# Altium PCB DUT_ESP32-D0WD-V3.PcbDoc
Units mm, origin at the board's own origin, x right, y up, seen from the top; angles counter-clockwise.
Board outline 33 x 90 mm, 2 copper layers (Top Layer, Bottom Layer); 27 components, 50 nets, 259 pads, 9 vias.
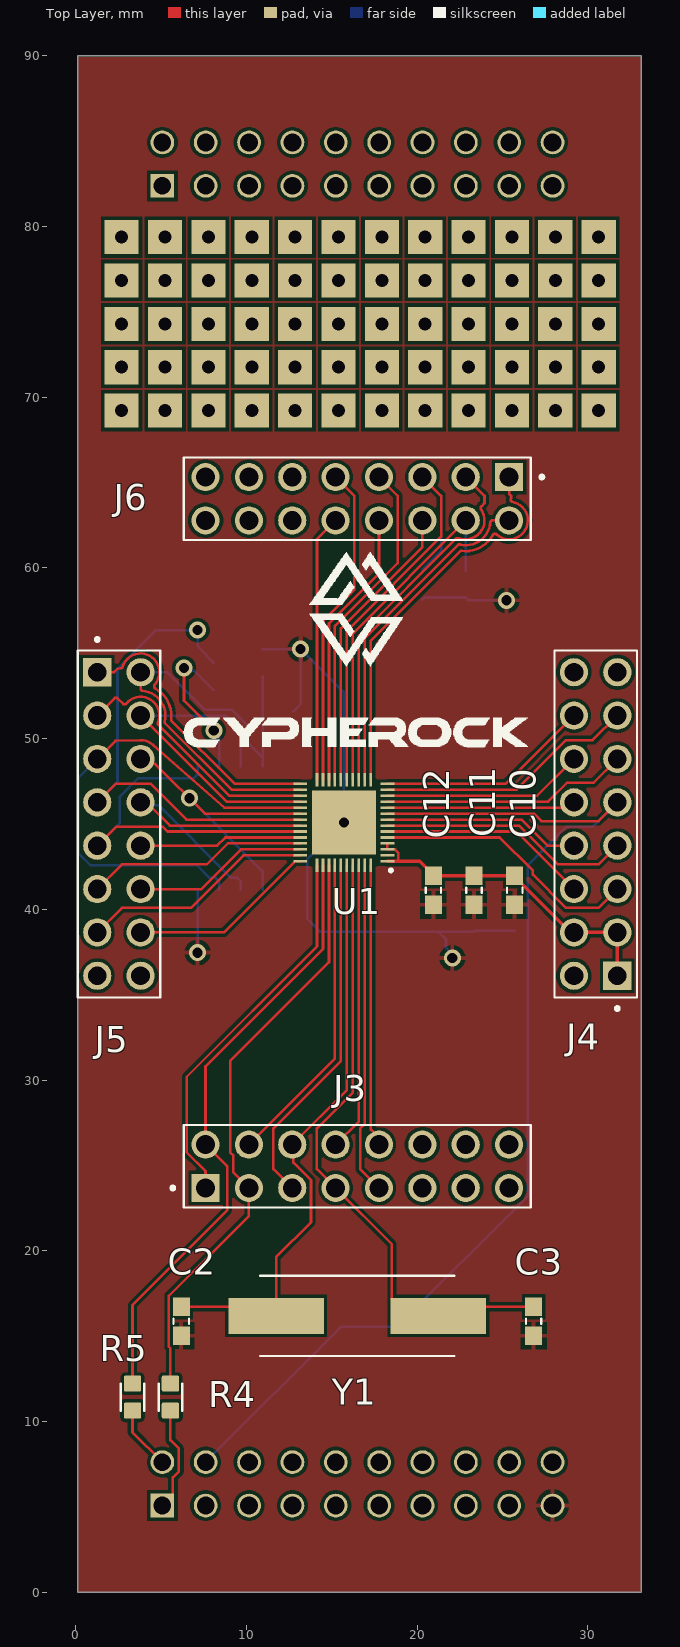
[diagram p0: Top Layer view]
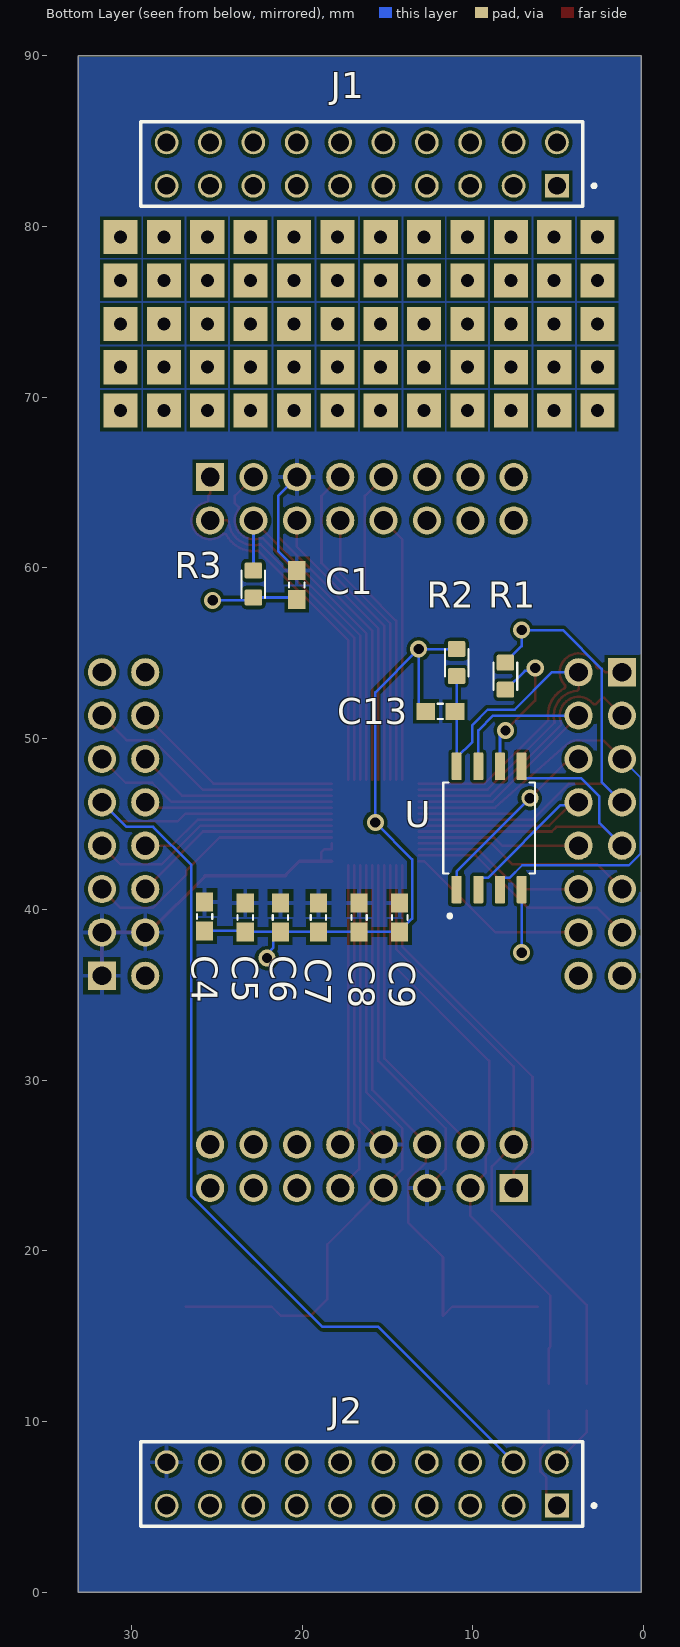
[diagram p1: Bottom Layer view, seen from below]
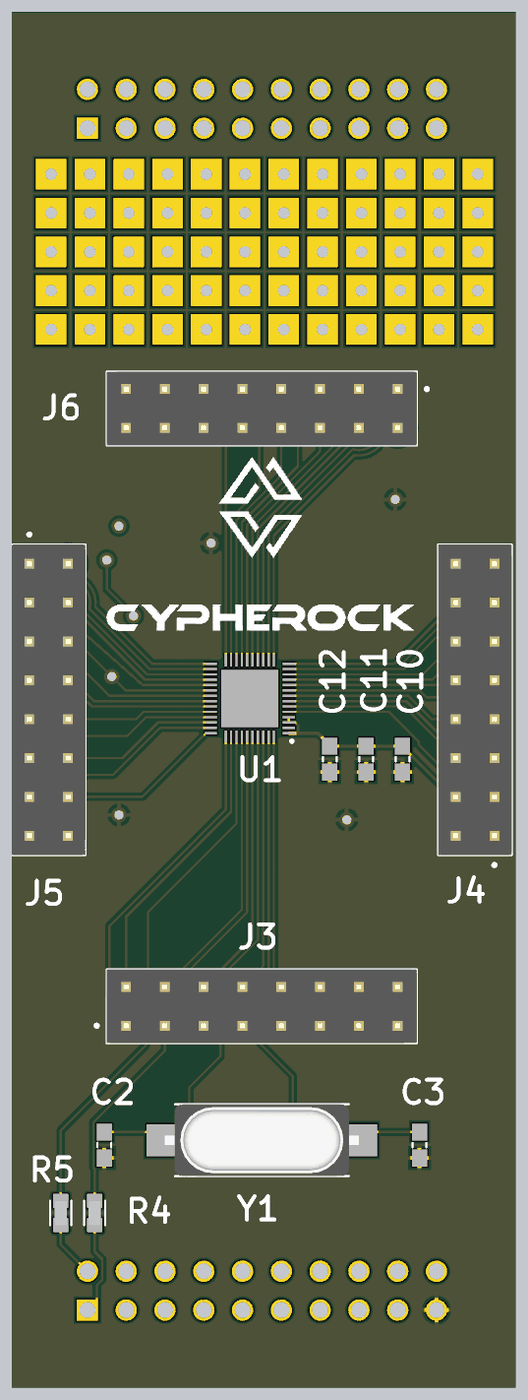
[diagram p2: 3D render of the assembled board from above, using the file's embedded part models]

## Layer stack, top to bottom
Top Solder: solder mask 0.0102, Solder Resist, Dk 3.5
Top Layer: signal copper 0.0356
Dielectric 1: dielectric 0.32, FR-4, Dk 4.8
Bottom Layer: signal copper 0.0356
Bottom Solder: solder mask 0.0102, Solder Resist, Dk 3.5

## Board outline
0.127,0 0.127,90 33.127,90 33.127,0

## Design rules (kind name [scope] priority, off if disabled: settings)
Clearance [All] p1: gap=0.2 ignorepadtopadclearanceinfootprint=FALSE except(0.15: Arc-SMDPad Track-SMDPad)
PolygonConnect [All] p1: connectstyle=Relief reliefconductorwidth=0.254 reliefentries=4 polygonreliefangle="90 Angle" airgapwidth=0.254
RoutingVias [All] p1: holewidth=0.711 width=1.27 viastyle="Through Hole" minholewidth=0.711 minwidth=1.27 maxholewidth=0.711 maxwidth=1.27
SolderMaskExpansion [All] p1: expansion=0.102 istentingtop=FALSE
Width [All] p1: maxlimit=0.254 minlimit=0.15 preferedwidth=0.254 minimp=50.000000 maximp=50.000000 favimp=50.000000
30 further rules are at their usual default settings.

## Components (designator, comment, footprint, x,y, rotation, side; value= is the part's Value field where it differs from the comment)
C1 "0.1uF" CAPC1608X90 20.32,58.999 r270 bottom
C2 "27pF" CAPC1608X90 6.191,15.875 r90 top
C3 "27pF" CAPC1608X90 26.829,15.875 r90 top
C4 "100pF" CAPC1608X90 25.717,39.585 r270 bottom
C5 "1uF" CAPC1608X90 23.336,39.529 r270 bottom
C6 "0.1uF" CAPC1608X90 21.273,39.529 r270 bottom
C7 "10uF" CAPC1608X90 19.05,39.529 r270 bottom
C8 "1uF" CAPC1608X90 16.669,39.529 r270 bottom
C9 "0.1uF" CAPC1608X90 14.287,39.529 r270 bottom
C10 "10uF" CAPC1608X90 25.717,41.116 r270 top
C11 "1uF" CAPC1608X90 23.336,41.116 r270 top
C12 "1uF" CAPC1608X90 20.955,41.116 r270 top
C13 "10uF" CAPC1608X90 11.906,51.594 r0 bottom
J1 "SSW-110-01-G-D-LL" SAMTEC_SSW-110-01-G-D-LL 5.08,82.38 r180 bottom
J2 "SSW-110-01-G-D-LL" SAMTEC_SSW-110-01-G-D-LL 5.08,5.08 r180 bottom locked
J3 "77313-124-16LF" AMPHENOL_77313-124-16LF 16.5,24.95 r0 top locked
J4 "77313-124-16LF" AMPHENOL_77313-124-16LF 30.46,45 r90 top
J5 "77313-124-16LF" AMPHENOL_77313-124-16LF 2.54,45 r270 top locked
J6 "77313-124-16LF" AMPHENOL_77313-124-16LF 16.5,64.05 r180 top
R1 "200E/0.1W" RESC1608X50N 8.096,53.657 r90 bottom
R2 "2k/0.1W" RESC1608X50N 10.954,54.451 r270 bottom
R3 "10k/0.1W" RESC1608X50N 22.86,59.055 r90 bottom
R4 "0E/0.1W" RESC1608X50N 5.556,11.43 r90 top
R5 "0E/0.1W" RESC1608X50N 3.334,11.43 r270 top
U "W25Q64BVSSIG" SOIC127P790X216-8N 9.049,44.767 r90 bottom
U1 "ESP32-D0WD-V3" QFN35P500X500X90-49N-D 15.716,45.085 r180 top
Y1 "ABLS-8.000MHZ-B2-T" XTAL_ABLS-8.000MHZ-B2-T 16.5,16.192 r0 top

## Footprints (in the part's own frame and the unit in brackets; to place one, negate y for a bottom-side part, rotate by r counter-clockwise, add the part's x,y. Pads: shape width x height; smd on the part's side, far side on the other; paste and mask are expansions set on the pad)
AMPHENOL_77313-124-16LF [mm]
  rect 1.65x1.65 / inner round 1.65 / far side rect 1.65x1.65 hole 1.1: 01(-8.89,-1.27)
  round 1.65 hole 1.1: 02(-8.89,1.27) 03(-6.35,-1.27) 04(-6.35,1.27) 05(-3.81,-1.27) 06(-3.81,1.27) 07(-1.27,-1.27) 08(-1.27,1.27) 09(1.27,-1.27) 10(1.27,1.27) 11(3.81,-1.27) 12(3.81,1.27) 13(6.35,-1.27) 14(6.35,1.27) 15(8.89,-1.27) 16(8.89,1.27)
  silkscreen extent -10.91,-2.41 10.16,2.41, body extent -10.16,-2.41 10.16,2.41, height 9.3
CAPC1608X90 [mm]
  rect 1.1x1 smd: 1(-0.85,0) 2(0.85,0)
  silkscreen extent -0.15,-0.45 0.15,0.45
QFN35P500X500X90-49N-D [mm]
  rect 0.8x0.15 smd: 1(-2.55,2.275) 2(-2.55,1.925) 3(-2.55,1.575) 4(-2.55,1.225) 5(-2.55,0.875) 6(-2.55,0.525) 7(-2.55,0.175) 8(-2.55,-0.175) 9(-2.55,-0.525) 10(-2.55,-0.875) 11(-2.55,-1.225) 12(-2.55,-1.575) 13(-2.55,-1.925) 14(-2.55,-2.275) 25(2.55,-2.275) 26(2.55,-1.925) 27(2.55,-1.575) 28(2.55,-1.225) 29(2.55,-0.875) 30(2.55,-0.525) 31(2.55,-0.175) 32(2.55,0.175) 33(2.55,0.525) 34(2.55,0.875) 35(2.55,1.225) 36(2.55,1.575) 37(2.55,1.925) 38(2.55,2.275)
  rect 0.15x0.8 smd: 15(-1.575,-2.5) 16(-1.225,-2.5) 17(-0.875,-2.5) 18(-0.525,-2.5) 19(-0.175,-2.5) 20(0.175,-2.5) 21(0.525,-2.5) 22(0.875,-2.5) 23(1.225,-2.5) 24(1.575,-2.5) 39(1.575,2.5) 40(1.225,2.5) 41(0.875,2.5) 42(0.525,2.5) 43(0.175,2.5) 44(-0.175,2.5) 45(-0.525,2.5) 46(-0.875,2.5) 47(-1.225,2.5) 48(-1.575,2.5)
  rect 3.75x3.75 smd: 49(0,0)
  silkscreen extent -2.84,2.71 -2.66,2.89
RESC1608X50N [mm]
  rrect20% 0.94x1.02 smd: 1(-0.79,0) 2(0.79,0)
  silkscreen extent -0.8,-0.69 0.8,0.69, body extent -0.8,-0.4 0.8,0.4, height 0.23
SAMTEC_SSW-110-01-G-D-LL [mm]
  rect 1.39x1.39 hole 1.04: 01(0,0)
  round 1.39 hole 1.04: 02(0,2.54) 03(-2.54,0) 04(-2.54,2.54) 05(-5.08,0) 06(-5.08,2.54) 07(-7.62,0) 08(-7.62,2.54) 09(-10.16,0) 10(-10.16,2.54) 11(-12.7,0) 12(-12.7,2.54) 13(-15.24,0) 14(-15.24,2.54) 15(-17.78,0) 16(-17.78,2.54) 17(-20.32,0) 18(-20.32,2.54) 19(-22.86,0) 20(-22.86,2.54)
  silkscreen extent -24.39,-1.21 2.27,3.75
SOIC127P790X216-8N [mm]
  rrect15% 1.61x0.58 smd: 1(-3.605,1.905) 2(-3.605,0.635) 3(-3.605,-0.635) 4(-3.605,-1.905) 5(3.605,-1.905) 6(3.605,-0.635) 7(3.605,0.635) 8(3.605,1.905)
  silkscreen extent -5.25,-2.69 2.67,2.69
XTAL_ABLS-8.000MHZ-B2-T [mm]
  rect 5.6x2.1 smd: 1(-4.75,0) 2(4.75,0)
  silkscreen extent -5.7,-2.35 5.7,2.35, body extent -6.35,-2.35 6.35,2.35, height 4.06

## Part data
C1 C4 C5 C6 C7 C8 C9 C10 C11 C12 C13: library part CC0603MRX5R7BB106, "CAP CER 10UF 16V X5R 0603", Package=None, Availability=Unavailable, MP=CC0603MRX5R7BB106, Price=None
C2 C3: library part CC0603MRX5R7BB106, "0603", Package=None, Availability=Unavailable, MP=CC0603MRX5R7BB106, Price=None
J1 J2: Package=None, Availability=Unavailable, MF="Samtec Inc.", MP=SSW-110-01-G-D-LL, Price=None
J3 J4 J5 J6: "BergStikÂ®, Board to Board connector, Unshrouded Header, 2.54 mm Pitch, Vertical, Double Row,Through Hole, 16 Positions", Package=None, Check_prices=https://www.snapeda.com/parts/77313-124-16LF/Amphenol+FCI/view-part/?ref=eda, MF="Amphenol ICC (FCI)", MP=77313-124-16LF, SnapEDA_Link=https://www.snapeda.com/parts/77313-124-16LF/Amphenol+FCI/view-part/?ref=snap
R1 R2 R3 R4 R5: library part 3-1879460-5, "RES 0.27 OHM 1% 1/10W 0603", Package=0603, Power_Rating=".1 W", Resistance=27, Tolerance=1%, Availability="In Stock", Check_prices=https://www.snapeda.com/parts/3-1879460-5/TE+Connectivity/view-part/?ref=eda, EU_RoHS_Compliance="Compliant with Exemptions", MF="TE Connectivity", MP=3-1879460-5, Price=None, SnapEDA_Link=https://www.snapeda.com/parts/3-1879460-5/TE+Connectivity/view-part/?ref=snap
U: "FLASH - NOR Memory IC 64Mb _8M x 8_ SPI 80MHz 8-SOIC", Package="SOIC-8 Winbond", Availability=Unavailable, MF="Winbond Electronics", MP=W25Q64BVSSIG, Price=None, SnapEDA_Link=https://www.snapeda.com/parts/W25Q64BVSSIG/Winbond%20Electronics/view-part/261027/?ref=snap
U1: "WiFi Development Tools (802.11) SMD IC WiFi Dual Core BT Combo", Manufacturer_Name="Espressif Systems", Mouser Part Number=356-ESP32-D0WD-V3, Datasheet Link=https://www.espressif.com/sites/default/files/documentation/esp32_datasheet_en.pdf, Geometry.Height=0.9mm, Manufacturer_Part_Number=ESP32-D0WD-V3, Mouser Price/Stock=https://www.mouser.co.uk/ProductDetail/Espressif-Systems/ESP32-D0WD-V3?qs=GBLSl2AkirsI7kXw8ZPing%3D%3D
Y1: "HC/49US (AT49) SMD LOW PROFILE CRYSTAL", Package="HC49/US Abracon", Availability="In Stock", Check_prices=https://www.snapeda.com/parts/ABLS-8.000MHZ-B2-T/Abracon+LLC/view-part/?ref=eda, MF="Abracon LLC", MP=ABLS-8.000MHZ-B2-T, Price=None, Purchase-URL=https://pricing.snapeda.com/search/part/ABLS-8.000MHZ-B2-T/?ref=eda, SnapEDA_Link=https://www.snapeda.com/parts/ABLS-8.000MHZ-B2-T/Abracon+LLC/view-part/?ref=snap

## Free pads (board coordinates)
  rect 2x2 hole 0.762: 17(2.699,69.215) 17(2.699,71.755) 17(2.699,74.295) 17(2.699,76.835) 17(2.699,79.375) 17(5.239,69.215) 17(5.239,71.755) 17(5.239,74.295) 17(5.239,76.835) 17(5.239,79.375) 17(7.779,69.215) 17(7.779,71.755) 17(7.779,74.295) 17(7.779,76.835) 17(7.779,79.375) 17(10.319,69.215) 17(10.319,71.755) 17(10.319,74.295) 17(10.319,76.835) 17(10.319,79.375) 17(12.859,69.215) 17(12.859,71.755) 17(12.859,74.295) 17(12.859,76.835) 17(12.859,79.375) 17(15.399,69.215) 17(15.399,71.755) 17(15.399,74.295) 17(15.399,76.835) 17(15.399,79.375) 17(17.939,69.215) 17(17.939,71.755) 17(17.939,74.295) 17(17.939,76.835) 17(17.939,79.375) 17(20.479,69.215) 17(20.479,71.755) 17(20.479,74.295) 17(20.479,76.835) 17(20.479,79.375) 17(23.019,69.215) 17(23.019,71.755) 17(23.019,74.295) 17(23.019,76.835) 17(23.019,79.375) 17(25.559,69.215) 17(25.559,71.755) 17(25.559,74.295) 17(25.559,76.835) 17(25.559,79.375) 17(28.099,69.215) 17(28.099,71.755) 17(28.099,74.295) 17(28.099,76.835) 17(28.099,79.375) 17(30.639,69.215) 17(30.639,71.755) 17(30.639,74.295) 17(30.639,76.835) 17(30.639,79.375)

## Via types
v1: diameter 1, hole 0.6, Top Layer to Bottom Layer, tented top, 9 vias

## Nets (pads, with @x,y where several pads share a name; then routed paths per layer and width w, separated by ;. In a path a pad name is that pad's centre, name@x,y a point inside that pad or via, vN(x,y) a via of type N, cw(c..) or ccw(c..) an arc to the next point about the centre after c; other vN are vias at no path point)
3V3: C1.1 C4.1 C5.1 C6.1 C7.1 C8.1 C9.1 C10.1 C11.1 C12.1 J2.20 J3.05 J3.08 J4.01 J4.03 J4.04 J6.05 U1.1 U1.3 U1.4 U1.19 U1.43 U1.46 | length 84.1
  Top Layer w0.15: J3.05 11.59,24.78 11.59,27.165 15.541,31.116 U1.43 ; J3.08 16.591,27.581 U1.46 ; U1.19 15.891,56.316 21.41,61.835 21.41,64.22 J6.05 ; U1.4 U1.3 18.709,43.51 18.891,43.328 18.891,42.81
  Top Layer w0.2: U1.1 18.891,42.81 20.161,42.81 20.955,42.016 C12.1 C11.1 C10.1 25.717,41.916 28.984,38.65 J4.04 J4.03 J4.01
  Bottom Layer w0.15: J6.05 21.41,64.22 21.41,60.989 20.32,59.899 C1.1
GND: J2.17
GNDA: C1.2 C2.1 C3.1 C4.2 C5.2 C6.2 C7.2 C8.2 C9.2 C10.2 C11.2 C12.2 C13.2 J2.19 R2.1 R3.1 U1.49 U.4 | length 46.9
  Bottom Layer w0.15: v1(7.144,37.465) U.4 ; R2.1 10.957,55.245 v1(13.176,55.245) ; C13.2 13.176,52.014 v1(13.176,55.245) ; C1.2 20.436,58.265 R3.1 23.022,58.102 v1(25.241,58.102) ; v1(22.066,37.148) 22.066,37.378 21.698,37.746 21.698,38.254 C6.2 ; C4.2 23.393,38.735 C5.2 C6.2 ; v1(13.176,55.245) 15.716,52.705 v1(15.716,45.085) 13.562,42.931 13.562,39.454 14.287,38.729 C9.2 C8.2 C7.2 C6.2
NetC2_2: C2.2 J3.06 U1.44 Y1.1 | length 34.8
  Top Layer w0.15: C2.2 11.217,16.725 Y1.1 11.75,19.632 13.79,21.672 13.79,24.136 12.756,25.17 12.756,26.154 J3.06 15.891,29.421 U1.44
NetC3_2: C3.2 J3.07 U1.45 Y1.2 | length 37
  Top Layer w0.15: U1.45 16.241,29.276 14.13,27.165 14.13,24.78 J3.07 18.525,20.385 18.525,17.167 19.5,16.192 Y1.2 21.783,16.725 C3.2
NetC13_1: C13.1 J5.02 R2.2 U1.26 U.8 | length 28.4
  Top Layer w0.15: J5.02 3.81,52.881 3.854,52.837 3.893,52.798 cw(c3.81,51.35) 5.22,51.01 5.22,50.993 5.22,50.93 9.14,47.01 U1.26
  Bottom Layer w0.15: J5.02 5.354,53.89 7.548,51.696 9.131,51.696 10.034,50.794 10.034,49.808 U.8@10.954,48.887 ; U.8 U.8@10.954,48.887 ; R2.2 10.954,51.594 U.8@10.954,48.887
NetJ2_01: J2.01 R4.1 | length 6.2
  Top Layer w0.15: J2.01 5.7,5.7 5.7,6.723 6.05,7.073 6.05,8.413 5.556,8.906 R4.1
NetJ2_02: J2.02 R5.2 | length 3.7
  Top Layer w0.15: R5.2 3.334,9.366 J2.02
NetJ2_03: J2.03
NetJ2_04: J2.04 J4.09 U1.9 | length 65.6
  Top Layer w0.15: U1.9 26.841,45.61 27.281,45.17 30.63,45.17 J4.09
  Bottom Layer w0.15: J2.04 15.541,15.541 18.806,15.541 26.49,23.224 26.49,42.586 28.734,44.83 30.29,44.83 J4.09
NetJ2_07: J2.07
NetJ2_08: J2.08
NetJ3_01: J3.01 U1.39 | length 22.5
  Top Layer w0.15: J3.01 7.61,24.664 6.51,25.764 6.51,30.197 14.141,37.828 U1.39
NetJ3_02: J3.02 R5.1 U1.40 | length 36
  Top Layer w0.15: R5.1 3.334,16.828 8.89,22.384 8.89,24.94 J3.02 7.61,30.802 14.491,37.683 U1.40
NetJ3_03: J3.03 R4.2 U1.41 | length 35.2
  Top Layer w0.15: R4.2 5.556,14.292 5.466,14.382 5.466,17.368 10.15,22.052 J3.03 9.24,24.59 9.24,25.574 9.05,25.764 9.05,31.117 14.841,36.908 U1.41
NetJ3_04: J3.04 U1.42 | length 18.5
  Top Layer w0.15: J3.04 15.191,31.261 U1.42
NetJ3_09: J3.09 U1.47 | length 19.5
  Top Layer w0.15: U1.47 16.941,27.436 16.67,27.165 16.67,24.78 J3.09
NetJ3_10: J3.10 U1.48 | length 16.6
  Top Layer w0.15: U1.48 17.291,27.105 17.77,26.626 J3.10
NetJ4_05: J4.05 U1.5 | length 15.8
  Top Layer w0.15: U1.5 24.842,44.21 26.788,42.264 26.788,42.036 28.734,40.09 30.63,40.09 J4.05
NetJ4_06: J4.06 U1.6 | length 12.3
  Top Layer w0.15: U1.6 25.82,44.56 J4.06
NetJ4_07: J4.07 U1.7 | length 14.9
  Top Layer w0.15: U1.7 25.965,44.91 28.245,42.63 30.63,42.63 J4.07
NetJ4_08: J4.08 U1.8 | length 11.6
  Top Layer w0.15: U1.8 26.11,45.26 27.64,43.73 J4.08
NetJ4_10: J4.10 U1.10 | length 11.1
  Top Layer w0.15: U1.10 28.474,45.96 28.784,46.27 J4.10
NetJ4_11: J4.11 U1.11 | length 14.5
  Top Layer w0.15: U1.11 27.674,46.31 28.781,47.416 30.336,47.416 J4.11
NetJ4_12: J4.12 U1.12 | length 11.8
  Top Layer w0.15: U1.12 27.04,46.66 J4.12
NetJ4_13: J4.13 U1.13 | length 15.3
  Top Layer w0.15: U1.13 25.834,47.01 28.734,49.91 30.29,49.91 J4.13
NetJ4_14: J4.14 U1.14 | length 12.6
  Top Layer w0.15: U1.14 25.2,47.36 J4.14
NetJ5_01: J5.01 U1.25 | length 17.1
  Top Layer w0.15: J5.01 2.254,53.89 2.457,54.093 2.64,54.119 ccw(c2.618,54.267) 2.761,54.221 cw(c3.81,53.89) 4.633,53.16 ccw(c4.746,53.061) 4.673,52.93 cw(c3.81,51.35) 5.598,51.146 5.598,51.138 5.598,51.075 9.314,47.36 U1.25
NetJ5_03: J5.03 U1.27 | length 15.6
  Top Layer w0.15: J5.03 2.308,52.388 2.432,52.388 2.802,52.018 2.864,52.018 2.927,52.018 2.971,52.062 2.975,52.066 cw(c3.81,51.35) 4.824,50.923 4.824,50.893 4.824,50.831 8.995,46.66 U1.27
NetJ5_04: J5.04 U1.28 U.7 | length 19.8
  Top Layer w0.15: J5.04 8.85,46.31 8.912,46.31 U1.28
  Bottom Layer w0.15: J5.04 7.399,51.35 7.403,51.346 8.82,51.346 9.684,50.482 U.7
NetJ5_05: J5.05 U1.29 U.3 | length 29.2
  Top Layer w0.15: J5.05 2.326,49.866 3.777,49.91 cw(c3.81,48.81) 4.538,49.635 8.705,45.96 U1.29
  Bottom Layer w0.15: J5.05 0.17,47.71 0.17,43.274 0.861,42.583 7.111,42.583 7.845,41.849 8.199,41.849 8.414,41.634 U.3
NetJ5_06: J5.06 U1.30 U.1 | length 17.8
  Top Layer w0.15: J5.06 4.097,48.523 4.658,48.523 7.571,45.61 U1.30
  Bottom Layer w0.15: J5.06 J5.06@3.821,48.81 ; v1(6.667,46.514) 10.954,42.227 U.1
NetJ5_07: J5.07 R1.2 U1.31 | length 29.5
  Top Layer w0.15: J5.07 2.37,47.37 4.383,47.37 6.493,45.26 U1.31
  Bottom Layer w0.15: J5.07 2.456,47.456 2.456,54.091 4.721,56.356 v1(7.144,56.356) 7.144,55.419 7.673,54.889 7.673,54.841 8.067,54.448 R1.2@8.092,54.448
NetJ5_08: J5.08 U1.32 U.2 | length 18.2
  Top Layer w0.15: J5.08 4.168,46.27 5.528,44.91 U1.32
  Bottom Layer w0.15: J5.08 3.976,46.104 4.86,46.104 9.115,41.849 9.469,41.849 9.684,41.634 U.2
NetJ5_09: J5.09 U1.33 U.5 | length 21.4
  Top Layer w0.15: J5.09 2.37,44.83 5.113,44.83 5.383,44.56 U1.33
  Bottom Layer w0.15: J5.09 2.592,45.052 2.592,46.608 3.67,47.686 6.929,47.686 7.144,47.901 U.5
NetJ5_10: J5.10 U1.34 | length 9.6
  Top Layer w0.15: J5.10 8.289,43.73 8.769,44.21 U1.34
NetJ5_11: J5.11 U1.35 | length 13
  Top Layer w0.15: J5.11 2.71,42.63 7.684,42.63 8.914,43.86 U1.35
NetJ5_12: J5.12 U1.36 | length 10.3
  Top Layer w0.15: J5.12 7.369,41.19 9.689,43.51 U1.36
NetJ5_13: J5.13 U1.37 | length 13.8
  Top Layer w0.15: J5.13 2.71,40.09 6.764,40.09 9.834,43.16 U1.37
NetJ5_14: J5.14 U1.38 | length 11.1
  Top Layer w0.15: J5.14 8.681,38.65 12.841,42.81 U1.38
NetJ6_01: J6.01 U1.15 | length 23.7
  Top Layer w0.15: U1.15 17.291,55.736 22.55,60.995 22.612,60.995 22.621,60.995 ccw(c22.85,62.78) 24.43,61.918 cw(c24.561,61.844) 24.66,61.957 ccw(c25.39,62.78) 25.567,63.866 25.534,63.899 25.491,63.943 25.491,64.067 25.513,64.089 25.513,64.213 25.39,64.336 J6.01
NetJ6_02: J6.02 U1.16 | length 19.8
  Top Layer w0.15: U1.16 16.941,55.881 22.43,61.37 22.493,61.37 22.51,61.37 ccw(c22.85,62.78) 24.298,62.697 24.337,62.736 24.381,62.78 J6.02
NetJ6_03: J6.03 U1.17 | length 21.9
  Top Layer w0.15: U1.17 16.591,56.026 22.287,61.722 22.315,61.75 22.439,61.75 22.554,61.72 ccw(c22.85,62.78) 23.754,63.406 23.726,63.448 23.726,63.572 23.763,63.61 23.95,63.796 23.95,64.22 J6.03
NetJ6_04: J6.04 R3.2 U1.18 | length 20.9
  Top Layer w0.15: U1.18 16.241,56.171 J6.04
  Bottom Layer w0.15: J6.04 22.85,59.855 R3.2
NetJ6_06: J6.06 U1.20 | length 17.2
  Top Layer w0.15: U1.20 15.541,56.461 20.31,61.23 J6.06
NetJ6_07: J6.07 U1.21 | length 19.7
  Top Layer w0.15: U1.21 15.191,56.606 18.87,60.285 18.87,64.22 J6.07
NetJ6_08: J6.08 U1.22 | length 16.4
  Top Layer w0.15: U1.22 14.841,56.751 17.77,59.68 J6.08
NetJ6_09: J6.09 U1.23 | length 19
  Top Layer w0.15: U1.23 14.491,56.896 16.33,58.735 16.33,64.22 J6.09
NetJ6_10: J6.10 U1.24 | length 15.6
  Top Layer w0.15: U1.24 14.141,61.691 J6.10
NetR1_1: R1.1 U.6 | length 8.9
  Top Layer w0.15: v1(6.35,54.134) 6.35,52.229 v1(8.096,50.482)
  Bottom Layer w0.15: v1(6.35,54.134) 6.513,53.971 6.953,53.971 8.056,52.867 R1.1 ; v1(8.096,50.482) 8.414,50.165 U.6
pads on no net: J1.01 J1.02 J1.03 J1.04 J1.05 J1.06 J1.07 J1.08 J1.09 J1.10 J1.11 J1.12 J1.13 J1.14 J1.15 J1.16 J1.17 J1.18 J1.19 J1.20 J2.05 J2.06 J2.09 J2.10 J2.11 J2.12 J2.13 J2.14 J2.15 J2.16 J2.18 J3.11 J3.12 J3.13 J3.14 J3.15 J3.16 J4.02 J4.15 J4.16 J5.15 J5.16 J6.11 J6.12 J6.13 J6.14 J6.15 J6.16 U1.2

## Polygon pours and split planes (outlines as drawn)
3V3 on Bottom Layer "3V3_L02_P001" (solid, remove dead copper, pour order 1): 0.127,89.916 0.127,0 33.147,0 33.147,89.916
GNDA on Top Layer "GNDA_L01_P000" (solid, remove dead copper, pour order 0): 0.127,89.916 0.127,0 33.147,0 33.147,89.916

## Silkscreen, mask and mechanical layers (free items; w line width, h text height)
Top Overlay:
  drawing of 11 lines, arcs and shapes, not listed